# EAGLE board aqc-dac-io-board (EAGLE 6.1)
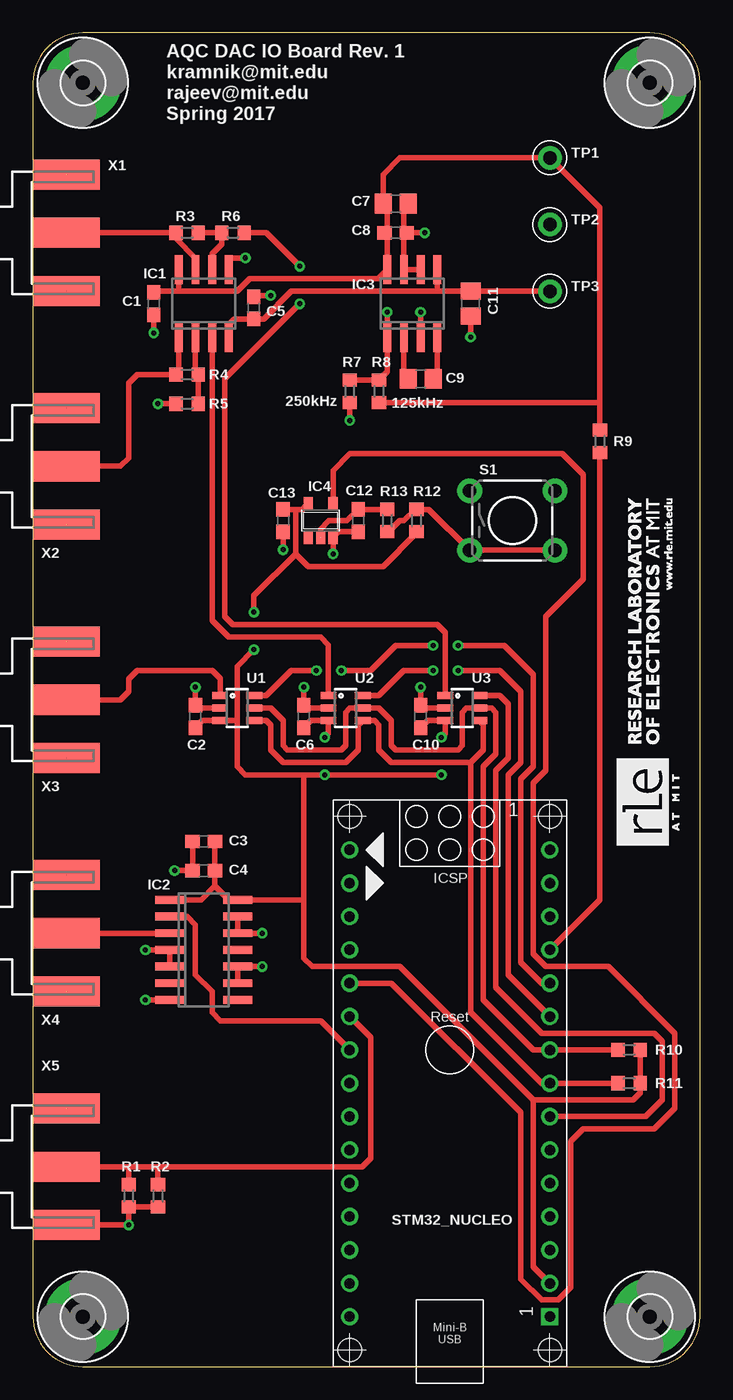
[diagram p0: board, top side]
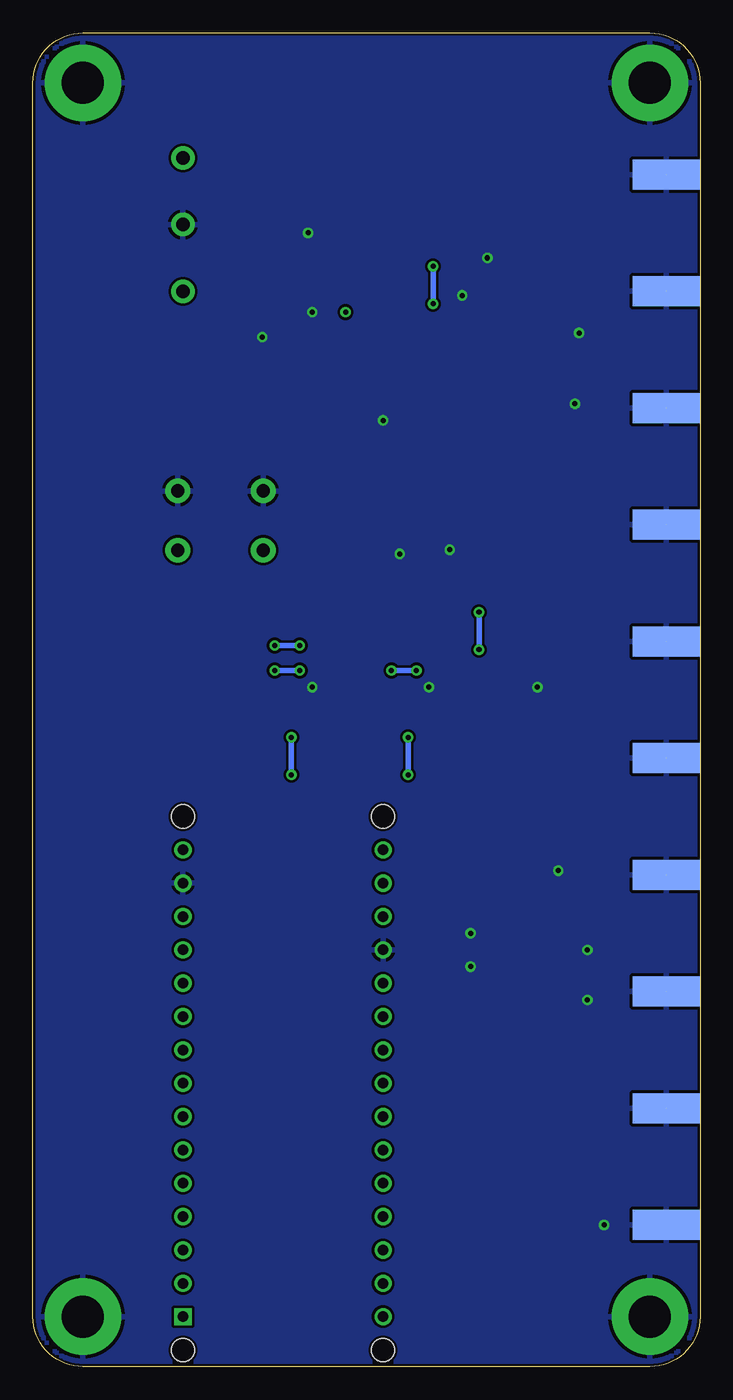
[diagram p1: board, bottom side, seen from below]

Size 50.8 x 101.6 mm. Coordinates in mm from the lower left corner, seen from the top.
Outline: 0,97.79 0,3.81 arc90 3.81,0 46.99,0 arc90 50.8,3.81 50.8,97.79 arc90 46.99,101.6 3.81,101.6 arc90 0,97.79
Copper layers (1*16): Top 0.035mm / dielectric 1.5mm / Bottom 0.035mm
Design rules: minimum track width 10mil, minimum drill 24mil, track to track 8mil, track to pad 8mil, pad to pad 8mil, via to via 8mil, smd to smd 8mil, copper to edge 8mil, drill to drill 8mil, minimum pad ring 10mil, minimum via ring 8mil, stop-mask expansion 4mil, vias tented up to drill 0mil, thermal gap 10mil
Net classes: 1 100OHM_DIFF: width 0.254 mm, clearance 0.254 mm

## Footprints (pad centres in the part's own frame; a part is rotated, then mirrored left to right if it is on the bottom)
C0603 = smd 1.1 x 1: 1 -0.85,0; 2 0.85,0
C0805 = smd 1.3 x 1.5: 1 -0.95,0; 2 0.95,0
3,2-PAD = drill 3.2 pad 5.842: B3,2 0,0
SO08 = smd 0.6 x 2.2: 1 -1.905,-2.6; 2 -0.635,-2.6; 3 0.635,-2.6; 4 1.905,-2.6; 5 1.905,2.6; 6 0.635,2.6; 7 -0.635,2.6; 8 -1.905,2.6
SO14 = smd 0.6 x 2.2: 1 -3.81,-2.6; 2 -2.54,-2.6; 3 -1.27,-2.6; 4 0,-2.6; 5 1.27,-2.6; 6 2.54,-2.6; 7 3.81,-2.6; 8 3.81,2.6; 9 2.54,2.6; 10 1.27,2.6; 11 0,2.6; 12 -1.27,2.6; 13 -2.54,2.6; 14 -3.81,2.6
SO8 = smd 0.6 x 2.2: 1 -1.905,-2.6; 2 -0.635,-2.6; 3 0.635,-2.6; 4 1.905,-2.6; 5 1.905,2.6; 6 0.635,2.6; 7 -0.635,2.6; 8 -1.905,2.6
SOT23-5 = smd 0.69 x 0.99: 1 -0.95,-1.29; 2 0,-1.29; 3 0.95,-1.29; 4 0.95,1.3; 5 -0.95,1.3
R0603 = smd 1 x 1.1: 1 -0.85,0; 2 0.85,0
TACTILE-PTH = drill 1.016 pad 1.88: 1 -3.251,2.261; 2 3.251,2.261; 3 -3.251,-2.261; 4 3.251,-2.261
ARDUINO_NANO = drill 0.8 square: 1 -20.32,-7.62 | drill 0.8: 2 -17.78,-7.62; 3 -15.24,-7.62; 4 -12.7,-7.62; 5 -10.16,-7.62; 6 -7.62,-7.62; 7 -5.08,-7.62; 8 -2.54,-7.62; 9 0,-7.62; 10 2.54,-7.62; 11 5.08,-7.62; 12 7.62,-7.62; 13 10.16,-7.62; 14 12.7,-7.62; 15 15.24,-7.62; 16 15.24,7.62; 17 12.7,7.62; 18 10.16,7.62; 19 7.62,7.62; 20 5.08,7.62; 21 2.54,7.62; 22 0,7.62; 23 -2.54,7.62; 24 -5.08,7.62; 25 -7.62,7.62; 26 -10.16,7.62; 27 -12.7,7.62; 28 -15.24,7.62; 29 -17.78,7.62; 30 -20.32,7.62 | hole 1.778: -22.86,-7.62; -22.86,7.62; 17.78,7.62; 17.78,-7.62
KEYSTONE_5000_MINIATURE = drill 1.016 pad 1.778: P$1 0,0
SOT23-6 = smd 0.55 x 1.2: 1 -0.95,-1.3; 2 0,-1.3; 3 0.95,-1.3; 4 0.95,1.3; 5 0,1.3; 6 -0.95,1.3
J502-ND-142-0701-801/806 = smd 5.08 x 2.286: 1 2.565,0; G@1 2.565,4.42; G@2 2.565,-4.42 | smd 5.08 x 2.286 bottom: G@3 2.565,4.42; G@4 2.565,-4.42

## Placement (x,y rotation side)
C1  100n  [C0603]  9.21,80.96 270 top
C2  100n  [C0603]  12.38,49.53 90 top
C3  100n  [C0603]  13.02,40.01 180 top
C4  10n  [C0603]  13.02,37.78 180 top
C5  100n  [C0603]  16.83,80.64 90 top
C6  100n  [C0603]  20.64,49.53 90 top
C7  4u7  [C0805]  27.62,88.58 0 top
C8  100n  [C0603]  27.62,86.36 0 top
C9  4u7  [C0805]  29.53,75.25 0 top
C10  100n  [C0603]  29.53,49.53 90 top
C11  4u7  [C0805]  33.34,80.96 270 top
C12  100n  [C0603]  24.77,64.45 270 top
C13  100n  [C0603]  19.05,64.45 270 top
H1  MOUNT-PAD-ROUND3.2  [3,2-PAD]  3.81,97.79 0 top
H2  MOUNT-PAD-ROUND3.2  [3,2-PAD]  3.81,3.81 0 top
H3  MOUNT-PAD-ROUND3.2  [3,2-PAD]  46.99,97.79 0 top
H4  MOUNT-PAD-ROUND3.2  [3,2-PAD]  46.99,3.81 0 top
IC1  LT1366  [SO08]  13.02,80.96 0 top
IC2  74LVT126  [SO14]  13.02,31.75 270 top
IC3  MAX1680  [SO8]  28.89,80.96 0 top
IC4  74AHC1G14DBV  [SOT23-5]  21.91,64.45 0 top
R1  100R  [R0603]  7.3,13.02 90 top
R2  100R  [R0603]  9.53,13.02 90 top
R3  15k0  [R0603]  11.75,86.36 0 top
R4  5k11  [R0603]  11.75,75.56 180 top
R5  10k0  [R0603]  11.75,73.34 0 top
R6  10k0  [R0603]  15.24,86.36 0 top
R7  0R  [R0603]  24.13,74.3 90 top
R8  DNP  [R0603]  26.35,74.3 270 top
R9  0R  [R0603]  43.18,70.48 270 top
R10  2k2  [R0603]  45.4,24.13 0 top
R11  2k2  [R0603]  45.4,21.59 0 top
R12  4k7  [R0603]  29.21,64.45 270 top
R13  100k  [R0603]  26.99,64.45 270 top
S1  [TACTILE-PTH]  36.51,64.45 0 top
STM32_NUCLEO  [ARDUINO_NANO]  31.75,24.13 90 top
TP1  PP_P5V0  [KEYSTONE_5000_MINIATURE]  39.37,92.08 0 top
TP2  GND  [KEYSTONE_5000_MINIATURE]  39.37,87 0 top
TP3  PP_N5V0  [KEYSTONE_5000_MINIATURE]  39.37,81.92 0 top
U1  MCP4725  [SOT23-6]  15.56,50.16 270 top
U2  MCP4725  [SOT23-6]  23.81,50.16 270 top
U3  MCP4725  [SOT23-6]  32.7,50.16 270 top
X1  CONN_VREF_CASCODE_IBIAS  [J502-ND-142-0701-801/806]  0,86.36 0 top
X2  CONN_VREF_DIAMOND_IBIAS  [J502-ND-142-0701-801/806]  0,68.58 0 top
X3  CONN_VREF_ONE_SHOT  [J502-ND-142-0701-801/806]  0,50.8 0 top
X4  CONN_FORCE_QUENCH  [J502-ND-142-0701-801/806]  0,33.02 0 top
X5  CONN_PHOTON_COUNTER  [J502-ND-142-0701-801/806]  0,15.24 0 top

## Library data of the parts
C1-C13 = rcl
H1-H4 = holes
IC1 IC2 = meng
IC3 S1 TP1-TP3 = Kramnik's Library
IC4 = 74xx-little-us
R1-R13 = resistor
STM32_NUCLEO = ArduinoNanoV30
U1-U3 = microbuilder
X1-X5 = con-coax; MF: JOHNSON COMPONENTS; MPN: 142-0701-801; OC_FARNELL: 1608592; OC_NEWARK: 90F2624

## Nets
DAC_CASCODE_IBIAS_SEL: STM32_NUCLEO.7 U3.6
DAC_DIAMOND_IBIAS_SEL: STM32_NUCLEO.10 U2.6
DAC_ONE_SHOT_SEL: STM32_NUCLEO.11 U1.6
DAC_SCL: R10.1 STM32_NUCLEO.9 U1.5 U2.5 U3.5
DAC_SDA: R11.1 STM32_NUCLEO.8 U1.4 U2.4 U3.4
FORCE_QUENCH_BUF: IC2.3 X4.1
FORCE_QUENCH_MCU: IC2.2 STM32_NUCLEO.22
GND: C1.2 C2.2 C3.2 C4.2 C5.2 C6.2 C7.2 C8.2 C10.2 C11.2 C12.2 C13.2 H1.B3,2 H2.B3,2 H3.B3,2 H4.B3,2 IC1.5 IC2.4 IC2.5 IC2.7 IC2.9 IC2.10 IC2.12 IC2.13 IC3.3 IC3.6 IC3.7 IC4.3 R1.1 R2.1 R5.1 R7.1 S1.1 S1.2 STM32_NUCLEO.14 STM32_NUCLEO.19 TP2.P$1 U1.2 U2.2 U3.2 X1.G@1 X1.G@2 X1.G@3 X1.G@4 X2.G@1 X2.G@2 X2.G@3 X2.G@4 X3.G@1 X3.G@2 X3.G@3 X3.G@4 X4.G@1 X4.G@2 X4.G@3 X4.G@4 X5.G@1 X5.G@2 X5.G@3 X5.G@4
N$1: U1.1 X3.1
N$2: R6.2 U3.1
N$3: IC1.6 R3.2 R6.1
N$4: IC3.1 R7.2 R8.1
N$5: IC1.7 R3.1 X1.1
N$6: IC1.3 U2.1
N$7: IC1.1 R4.2 X2.1
N$8: IC1.2 R4.1 R5.2
N$9: R9.2 STM32_NUCLEO.12
N$11: R12.1 R13.2 S1.3 S1.4
N$12: C12.1 IC4.2 R13.1
N$14: C9.2 IC3.4
N$15: C9.1 IC3.2
PHOTON_COUNTER: R1.2 R2.2 STM32_NUCLEO.21 X5.1
PP_N5V0: C5.1 C11.1 IC1.4 IC3.5 TP3.P$1
PP_P3V3: C2.1 C3.1 C4.1 C6.1 C10.1 C13.1 IC2.1 IC2.14 IC4.5 R10.2 R11.2 R12.2 STM32_NUCLEO.2 U1.3 U2.3 U3.3
PP_P5V0: C1.1 C7.1 C8.1 IC1.8 IC3.8 R8.2 R9.1 TP1.P$1
TRIGGER_BTN: IC4.4 STM32_NUCLEO.20
VIN: STM32_NUCLEO.15

## Tracks (layer width: path | path; a pad name or v marks a point on that pad's centre or on a via)
DAC_CASCODE_IBIAS_SEL
  Top 0.406: STM32_NUCLEO.7 46.67,19.05 47.94,20.32 47.94,24.77 47.31,25.4 38.73,25.4 35.24,28.89 35.24,45.4 36.2,46.35 36.2,50.48 35.56,51.12 U3.6
DAC_DIAMOND_IBIAS_SEL  (via drill 0.38)
  Top 0.406: STM32_NUCLEO.10 36.2,29.84 36.2,45.09 37.15,46.04 37.15,51.44 35.56,53.02 v32.38,53.02 | U2.6 26.35,51.12 28.26,53.02 v30.48,53.02
  Bottom 0.406: v30.48,53.02 v32.38,53.02
DAC_ONE_SHOT_SEL  (via drill 0.38)
  Top 0.406: STM32_NUCLEO.11 38.73,29.21 37.15,30.8 37.15,44.77 38.1,45.72 38.1,52.7 35.88,54.93 v32.38,54.93 | v30.48,54.93 27.62,54.93 25.72,53.02 v23.5,53.02 | U1.6 17.78,51.12 19.68,53.02 v21.59,53.02
  Bottom 0.406: v23.5,53.02 v21.59,53.02 | v30.48,54.93 v32.38,54.93
DAC_SCL
  Top 0.406: U1.5 18.1,50.16 19.05,49.21 19.05,47.31 19.37,46.99 23.5,46.99 23.81,47.31 23.81,49.85 24.13,50.16 U2.5 26.35,50.16 27.3,49.21 27.3,47.31 27.62,46.99 32.38,46.99 32.7,47.31 32.7,49.85 33.02,50.16 U3.5 34.92,50.16 35.24,49.85 35.24,46.67 34.29,45.72 34.29,27.94 38.1,24.13 STM32_NUCLEO.9 R10.1
DAC_SDA
  Top 0.406: U1.4 17.78,49.22 18.1,48.9 18.1,46.99 19.05,46.04 23.81,46.04 24.77,46.99 24.77,48.87 U2.4 26.03,49.22 26.35,48.9 26.35,46.99 27.3,46.04 33.34,46.04 | R11.1 STM32_NUCLEO.8 38.73,21.59 33.34,26.99 33.34,46.04 | 33.34,46.04 34.29,46.99 34.29,48.93 U3.4
FORCE_QUENCH_BUF
  Top 0.406: IC2.3 X4.1
FORCE_QUENCH_MCU
  Top 0.406: IC2.2 11.75,34.29 12.38,33.66 12.38,29.84 13.65,28.57 13.65,26.99 14.29,26.35 21.91,26.35 STM32_NUCLEO.22
GND  (via drill 0.38)  (9 unrouted)
  Top 0.406: v29.53,51.75 C10.2 29.74,50.16 U3.2 | U2.2 20.85,50.16 C6.2 v20.64,51.75 | U1.2 12.6,50.16 C2.2 v12.38,51.75 | C3.2 C4.2 v10.79,37.78 | IC2.5 IC2.4 v8.57,31.75 | IC2.9 IC2.10 v17.46,30.48 | IC2.13 IC2.12 v17.46,33.02 | v8.57,27.94 IC2.7 | C1.2 v9.21,78.74 | R5.1 v9.53,73.34 | 28.26,86.36 IC3.7 IC3.6 | 28.26,86.36 28.26,88.27 C7.2 | 28.26,86.36 C8.2 v29.84,86.36 | IC3.3 v29.53,80.33 | v33.34,78.42 C11.2 | v16.19,84.45 14.92,84.45 IC1.5 | v18.1,81.6 16.93,81.6 C5.2 | X5.G@4 7.28,10.82 v7.3,10.79 R1.1 R2.1 | R7.1 v24.13,72.07 | C13.2 v19.05,62.23 | v22.86,61.91 IC4.3 23.3,63.6 C12.2
  pour Bottom: 0,0 50.8,0 50.8,101.6 0,101.6
N$1
  Top 0.406: U1.1 14.26,52.42 13.65,53.02 7.94,53.02 7.3,52.39 7.3,51.44 6.67,50.8 X3.1
N$2  (via drill 0.38)
  Top 0.406: U3.1 31.4,55.91 30.8,56.52 15.24,56.52 14.61,57.15 14.61,75.25 v20.32,80.96 | R6.2 17.78,86.36 v20.32,83.82
  Bottom 0.406: v20.32,80.96 v20.32,83.82
N$3
  Top 0.406: R3.2 R6.1 14.39,85.51 13.65,84.77 IC1.6
N$4  (via drill 0.38)
  Top 0.406: v26.99,80.33 IC3.1 26.99,75.78 R8.1 R7.2
N$5
  Top 0.406: IC1.7 12.38,84.45 10.9,85.94 R3.1 X1.1
N$6
  Top 0.406: IC1.3 13.65,56.83 14.92,55.56 21.91,55.56 22.51,54.96 U2.1
N$7
  Top 0.406: IC1.1 11.11,75.78 R4.2 7.94,75.56 7.3,74.93 7.3,69.22 6.67,68.58 X2.1
N$8
  Top 0.406: IC1.2 12.38,75.78 R4.1 R5.2
N$9
  Top 0.406: R9.2 43.18,35.56 STM32_NUCLEO.12
N$11
  Top 0.406: S1.4 S1.3 30.15,65.3 R12.1 29.11,65.3 28.26,64.45 27.94,64.45 27.09,63.6 R13.2
N$12
  Top 0.406: IC4.2 21.91,63.82 22.54,64.45 23.91,64.45 C12.1 R13.1
N$14
  Top 0.406: IC3.4 30.8,75.57 C9.2
N$15
  Top 0.406: IC3.2 28.26,75.57 C9.1
PHOTON_COUNTER
  Top 0.406: X5.1 7.3,15.24 | R1.2 7.3,15.24 | 7.3,15.24 9.53,15.24 | R2.2 9.53,15.24 | 9.53,15.24 25.08,15.24 25.72,15.88 25.72,25.08 STM32_NUCLEO.21
PP_N5V0
  Top 0.406: IC1.4 14.92,79.38 15.34,79.8 C5.1 17.57,79.8 19.68,81.92 30.8,81.92 | 30.8,81.92 C11.1 TP3.P$1 | IC3.5 30.8,81.92
PP_P3V3  (via drill 0.38)
  Top 0.406: C10.1 30.06,49.22 U3.3 31.4,48.23 v31.11,47.94 | C6.1 21.17,49.22 U2.3 22.51,48.23 v22.23,47.94 | C2.1 12.92,49.22 U1.3 15.55,49.22 15.56,49.21 | C3.1 C4.1 13.87,36.62 | 13.87,36.62 14.92,35.56 IC2.14 20.64,35.56 | IC2.1 12.81,35.56 13.87,36.62 | STM32_NUCLEO.2 38.1,7.62 38.1,20.32 | R10.2 R11.2 46.25,20.85 45.72,20.32 38.1,20.32 | v31.11,45.09 v22.23,45.09 20.64,45.09 | 20.64,45.09 16.19,45.09 15.56,45.72 15.56,49.21 | 20.64,35.56 20.64,45.09 | 20.64,35.56 20.64,31.11 21.27,30.48 27.94,30.48 38.1,20.32 | C13.1 20,65.3 | 20,65.3 20.51,65.3 IC4.5 | R12.2 29.21,63.5 26.67,60.96 20.95,60.96 20,61.91 | 20,61.91 20,65.3 | 15.56,49.21 15.56,53.34 v16.83,54.61 | v16.83,57.47 16.83,58.74 20,61.91
  Bottom 0.406: v22.23,47.94 v22.23,45.09 | v31.11,45.09 v31.11,47.94 | v16.83,54.61 v16.83,57.47
PP_P5V0
  Top 0.406: 26.99,86.36 IC3.8 26.29,82.87 16.51,82.87 15.56,81.92 11.11,81.92 | 26.99,86.36 26.99,88.27 C7.1 26.67,90.81 27.94,92.08 TP1.P$1 43.18,88.27 43.18,73.34 | C8.1 26.99,86.36 | 11.11,81.92 9.31,81.92 C1.1 | IC1.8 11.11,81.92 | R8.2 43.08,73.44 43.18,73.34 | 43.18,73.34 R9.1
TRIGGER_BTN
  Top 0.406: STM32_NUCLEO.20 27.3,29.21 37.15,19.37 37.15,6.67 38.73,5.08 40.01,5.08 40.96,6.03 40.96,17.14 41.91,18.1 47.31,18.1 48.9,19.68 48.9,25.4 43.81,30.48 39.05,30.48 38.1,31.43 38.1,44.45 39.05,45.4 39.05,57.15 41.91,60.01 41.91,67.94 40.32,69.53 24.13,69.53 22.86,68.26 IC4.4

## Text on the board
tPlace: AQC DAC IO Board Rev. 1 | kramnik@mit.edu | rajeev@mit.edu | Spring 2017 | 250kHz | 125kHz